# Altium PCB New_Energizer_SMD.PcbDoc (part 1 of 2)
Units mm, origin at the board's own origin, x right, y up, seen from the top; angles counter-clockwise.
Board outline 230.98 x 169 mm, 2 copper layers (Top Layer, Bottom Layer); 143 components, 111 nets, 443 pads, 129 vias.
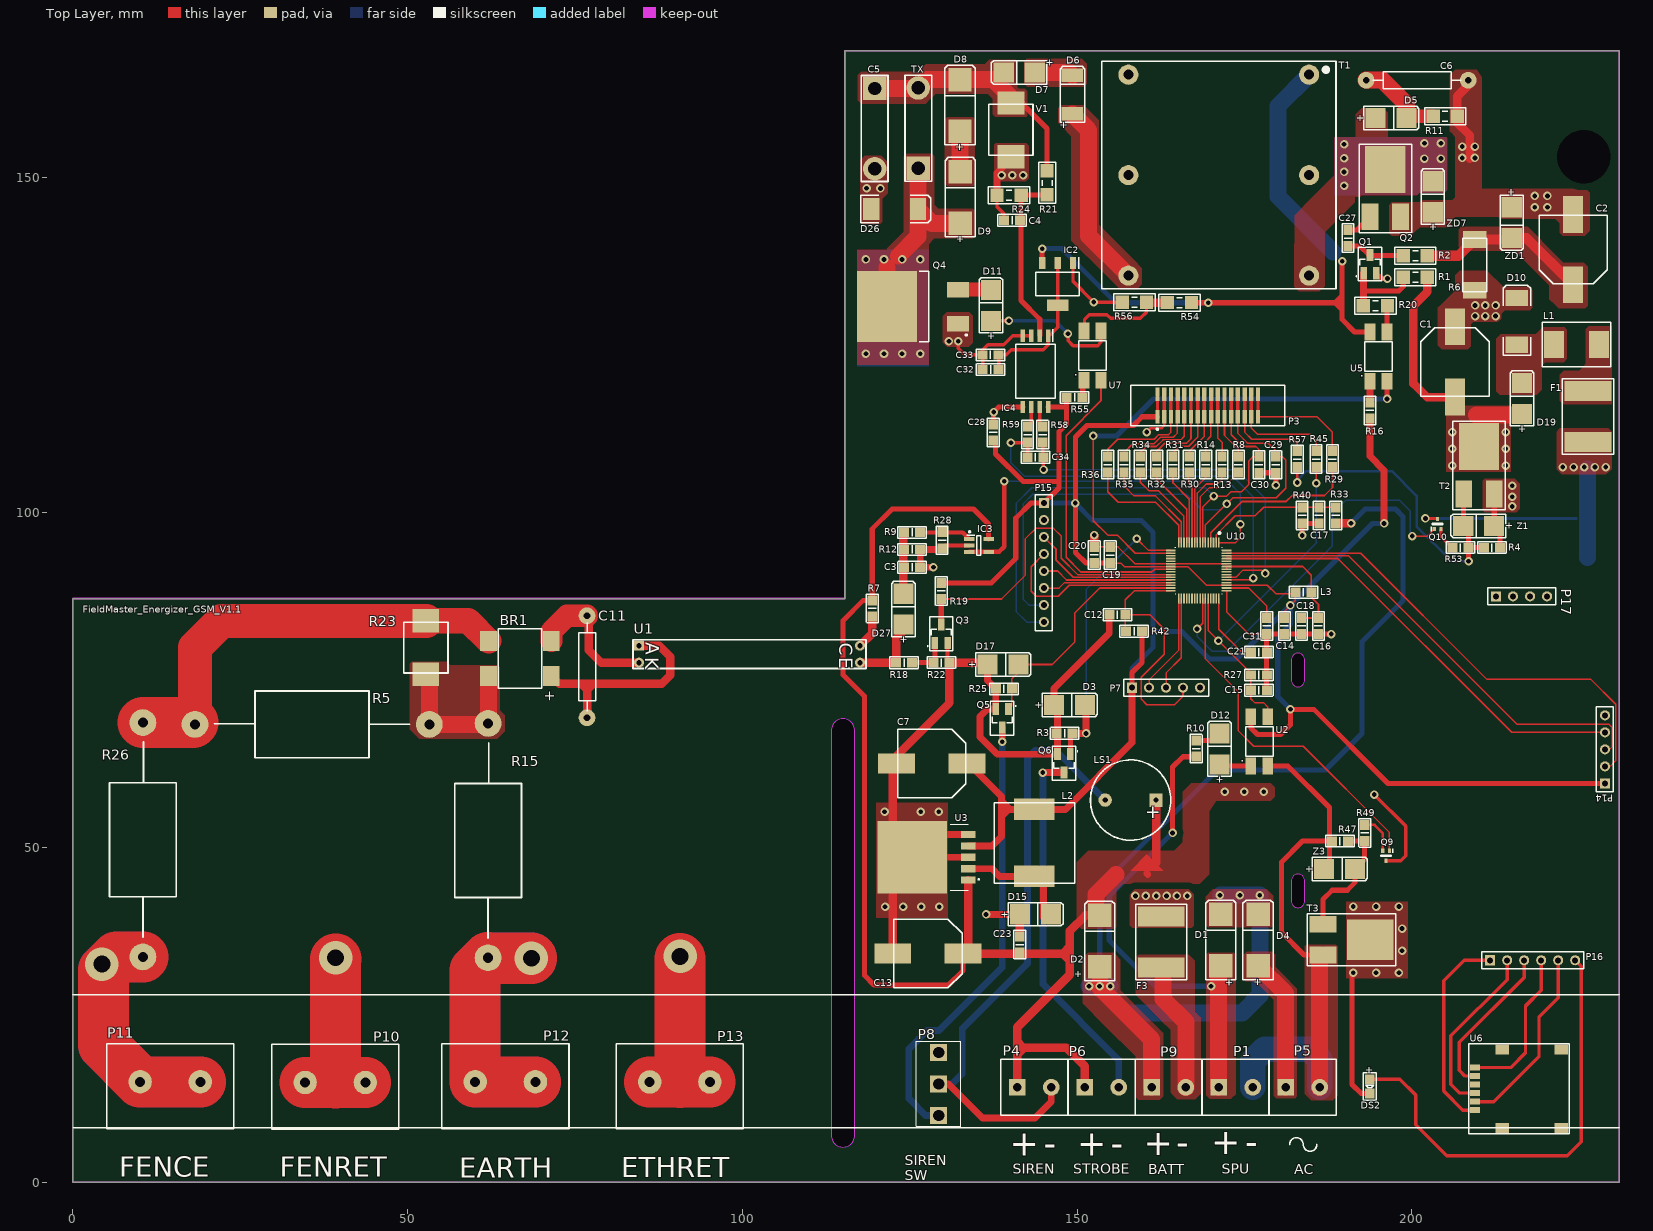
[diagram p0: Top Layer view]
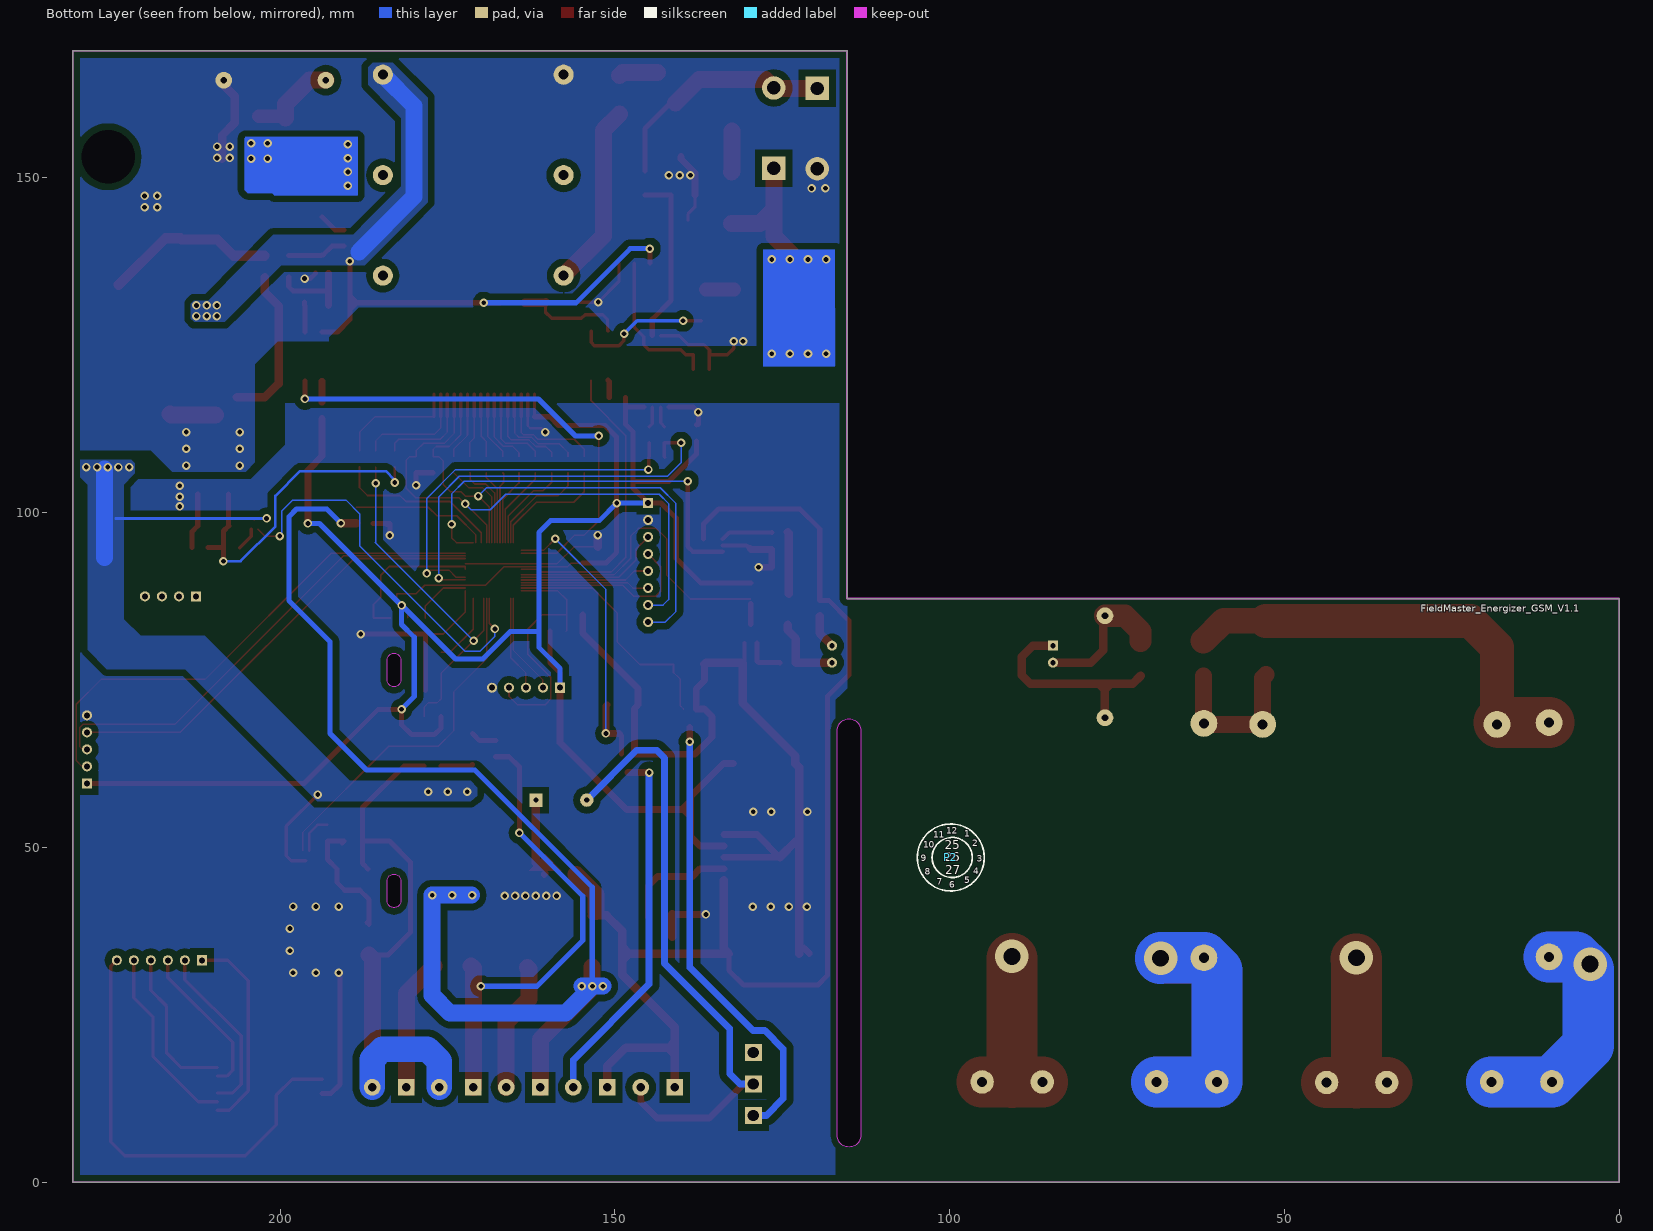
[diagram p1: Bottom Layer view, seen from below]

## Layer stack, top to bottom
Top Solder: solder mask 0.0102, Solder Resist, Dk 3.5
Top Layer: signal copper 0.0356
Dielectric 1: dielectric 0.32, FR-4, Dk 4.8
Bottom Layer: signal copper 0.0356
Bottom Solder: solder mask 0.0102, Solder Resist, Dk 3.5

## Board outline
0,0 0,87.175 115.325,87.175 115.325,169 230.975,169 230.975,0
cut-out: 113.275,7 ccw(c115.025,7) 116.775,7 116.775,67.45 ccw(c115.025,67.45) 113.275,67.45
cut-out: 181.975,42 ccw(c182.975,42) 183.975,42 183.975,45 ccw(c182.975,45) 181.975,45
cut-out: 181.975,75 ccw(c182.975,75) 183.975,75 183.975,78 ccw(c182.975,78) 181.975,78

## Design rules (kind name [scope] priority, off if disabled: settings)
Clearance Clearance_2 [InNamedPolygon('LOAD-_L02_P107')] p1: gap=1.016
Clearance Clearance_1 [InNamedPolygon('Bottom Layer-No Net')] p2: gap=1.016
Clearance Clearance_U10 [All vs HasFootprint('LQFP-64')] p3: gap=0.152
Clearance [All] p4: gap=0.254 except(0.14: Arc-Track Track-Track)
PolygonConnect [All] p1: connectstyle=Direct reliefconductorwidth=0.254 reliefentries=4 polygonreliefangle="90 Angle" airgapwidth=0.254
RoutingVias [All] p1: holewidth=0.711 width=1.27 viastyle="Through Hole" minholewidth=0.711 minwidth=1.27 maxholewidth=0.711 maxwidth=1.27
SolderMaskExpansion [All] p1: expansion=0.102
Width [All] p1: maxlimit=7.62 minlimit=0.203 preferedwidth=0.762 minimp=50.000000 maximp=50.000000 favimp=50.000000
30 further rules are at their usual default settings.

## Classes and differential pairs
component class Controller: 40 C7 C12 C13 C14 C16 C18 C19 C20 C23 C29 C30 D15 L2 L3 P7 P14 P15 R42 U3
component class Voltage_Booster: C1 C2 C4 C5 C6 C27 C28 C32 C33 C34 D5 D6 D7 D8 D9 D10 D11 D19 D26 IC2 IC4 Q1 Q2 Q4 R1 R2 R6 R11 R16 R20 R21 R24 R54 R55 R56 R58 R59 T1 TX U5 U7 V1 ZD1 ZD7
component class Controller_SolarCharge: BR1 C3 C11 C15 C17 D1 D2 D3 D4 D12 D17 D27 F1 F3 IC3 L1 LS1 P1 P2 P3 P4 P5 P6 P8 P9 P10 P11 P12 P13 Q3 Q5 Q6 Q9 Q10 R3 R4 R5 R7 R8 R9 R10 R12 R13 R14 R15 R18 R19 R22 R23 R25 R26 R27 R28 R29 R30 R31 R32 R33 R34 R35 R36 R40 R45 R47 R49 R53 R57 T2 T3 U1 U2 Z1 Z3
component class Controller_Part: C21 C31 U10
component class GSM_Module: DS2 P16 P17 U6

## Components (designator, comment, footprint, x,y, rotation, side; value= is the part's Value field where it differs from the comment)
BR1 "DB107S" "DB-S_BRIDGE RECTIFIER" 66.777,78.232 r270 top
C1 "Cap Pol1" CAP_470UF_10X10.2MM 206.425,122.5 r180 top
C2 "Cap Pol1" CAP_470UF_10X10.2MM 224.075,139.275 r0 top
C3 "Cap" 0805 125.35,91.85 r0 top
C4 "Cap" 0805 140.275,143.675 r0 top
C5 "Cap2" ENERGIZER_CONNECTOR 119.761,157.347 r270 top locked
C6 "Cap" "RES AXIAL-0.6" 200.775,164.575 r180 top
C7 "Cap2" CAP_470UF_10X10.2MM 128.275,62.525 r90 top
C11 "Cap" "RES AXIAL-0.6" 76.8,76.975 r270 top
C12 "Cap" 0805 156,84.75 r0 top
C13 "Cap2" CAP_470UF_10X10.2MM 127.7,34.15 r90 top
C14 "Cap2" 0805 180.95,83.1 r270 top
C15 "Cap" 0805 177.125,73.475 r180 top
C16 "Cap" 0805 186.025,83.075 r90 top
C17 "Cap" 0805 186.106,99.6 r270 top
C18 "Cap" 0805 183.5,83.075 r90 top
C19 "Cap" 0805 154.95,93.65 r270 top
C20 "Cap" 0805 152.55,93.675 r270 top
C21 "Cap" 0805 177.125,79.175 r180 top
C23 "Cap" 0805 141.425,35.475 r90 top
C27 "Cap" 0805 190.45,141 r90 top
C28 "Cap" 0805 137.475,111.975 r270 top
C29 "Cap" 0805 179.65,107.15 r270 top
C30 "Cap" 0805 177.15,107.15 r270 top
C31 "Cap" 0805 178.3,83.075 r90 top
C32 "Cap" 0805 137.075,121.375 r0 top
C33 "Cap" 0805 137.05,123.55 r0 top
C34 "Cap" 0805 143.75,108.275 r0 top
D1 "SS54" SMC#1 171.45,36.15 r90 top
D2 "SS54" SMC#1 153.375,36 r90 top
D3 "ZM4733A" SMA 148.85,71.3 r0 top
D4 "SS54" SMC#1 177.025,36.15 r90 top
D5 "M7 - (1N4007)" SMA 196.875,158.925 r0 top
D6 "RGL41M" DO-213AB 149.275,162.425 r90 top
D7 "M7 - (1N4007)" SMA 141.35,165.75 r180 top
D8 "S10MC" SMC#1 132.5,160.825 r90 top
D9 "S10MC" SMC#1 132.55,147.05 r90 top
D10 "SS54" SMC#2 215.65,128.55 r90 top
D11 "M7 - (1N4007)" SMA 137.1,130.95 r90 top
D12 "ZM4728A" SMA 171.25,64.7 r90 top
D15 "SS34" SMA 143.75,40.025 r0 top
D17 "ZM4733A" SMA 138.925,77.325 r0 top
D19 "SMBJ14CA" SMA 216.425,117.025 r90 top
D26 "S10MC" SMC#2 122.725,145.35 r0 top
D27 "SS14" SMA 124.05,85.575 r90 top
DS2 "NETLIGHT" 0805_LED 193.715,14.325 r270 top
F1 "LF-500/16 16V 5A" LF500-16 226.275,114.375 r90 top
F3 "LF-500/16 16V 5A" LF500-16 162.55,35.875 r90 top
IC2 "LM1117IMPX3.3_NOPB" SOT230P700X180-4N 147.075,134.125 r270 top
IC3 "LM321MF_NOPB" SOT95P280X145-5N 135.325,95.1 r0 top
IC4 "AMC1311BDWVR" SOIC127P1150X280-8N 143.775,121.1 r270 top
L1 "Inductor" INDUCTOR_SMD_3.3UH 224.55,125.125 r180 top
L2 "Inductor" Inductor_SMD_33uh 143.6,50.675 r90 top
L3 "Ferrite Bead_500mA" 0805 183.775,88.125 r0 top
LS1 "Buzzer" BUZZER 157.975,57.075 r180 top
P1 "SPU" "SCREW_TERMINAL 2PIN 5.08MM" 173.675,14.172 r0 top
P2 "Manufacturing Date" MFT_DATE 99.825,48.5 r180 bottom
P3 "Header 16" FPC_CON_16PIN 169.5,115.995 r0 top
P4 "SIREN" "SCREW_TERMINAL 2PIN 5.08MM" 143.6,14.172 r0 top
P5 "AC" "SCREW_TERMINAL 2PIN 5.08MM" 183.675,14.172 r0 top
P6 "STROBE" "SCREW_TERMINAL 2PIN 5.08MM" 153.663,14.172 r0 top
P7 "PROG" HDR1X5 158.195,73.85 r0 top
P8 "SIREN_SW" SWITCH_SLIDE 129.3,9.975 r0 top
P9 "BATT" "SCREW_TERMINAL 2PIN 5.08MM" 163.675,14.172 r0 top
P10 "PULSE_RET" "SCREW_TERMINAL ENERGIZER" 29.7,7.9 r0 top
P11 "GND2" "SCREW_TERMINAL ENERGIZER" 5.055,7.997 r0 top
P12 "PULSE" "SCREW_TERMINAL ENERGIZER" 55.093,7.997 r0 top
P13 "EARTH_RET" "SCREW_TERMINAL ENERGIZER" 81.15,7.975 r0 top
P14 "SIM_WIFI" HDR1X5 228.815,59.566 r90 top
P15 "LCD_CON" HDR1X8 145.025,101.435 r270 top
P16 "SIM_CARD" HDR1X6 211.67,33.15 r0 top
P17 "HOLDER" HDR1X4 212.559,87.506 r0 top
Q1 "BC847" SOT-23 193.725,137.125 r90 top
Q2 "IPD70R600P7S" "TO252 (DPAK)" 196.014,147.95 r0 top
Q3 "BC847" SOT-23 129.7,81.9 r90 top
Q4 "TN1625" D2PAK 123.632,139.792 r90 top
Q5 "SI2304" SOT-23 138.8,69.3 r270 top
Q6 "SI2304" SOT-23 148.025,62.55 r270 top
Q9 "DTC043ZEBTL" SOTFL50P160X85-3N 196.125,48.75 r270 top
Q10 "DTC043ZEBTL" SOTFL50P160X85-3N 203.825,98.3 r90 top
R1 "Res1" 1206 200.5,135.15 r0 top
R2 "Res1" 1206 200.5,138.375 r0 top
R3 "Res1" 0805 148.125,67.05 r0 top
R4 "Res1" 0805 211.925,94.775 r180 top
R5 "Res1" "POWER_RES 5W_35mm" 35.75,68.375 r180 top
R6 "Res1" 2512 209.375,137 r90 top
R7 "Res1" 0805 119.4,85.7 r90 top
R8 "Res1" 0805 174.073,107.175 r90 top
R9 "Res1" 0805 125.35,97.05 r180 top
R10 "Res1" 0805 167.775,64.75 r270 top
R11 "Res1" 1206 204.95,159.225 r180 top
R12 "Res1" 0805 125.35,94.5 r180 top
R13 "Res1" 0805 171.633,107.175 r90 top
R14 "Res1" 0805 169.192,107.175 r90 top
R15 "Power Resistor" "POWER_RES 5W_35mm" 62.025,51.025 r90 top
R16 "Res1" 0805 193.725,115.275 r270 top
R18 "Res1" 0805 124.15,77.575 r180 top
R19 "Res1" 0805 129.7,88.3 r90 top
R20 "Res1" 1206 194.55,130.925 r0 top
R21 "Res1" 1206 145.5,149.25 r270 top
R22 "Res1" 0805 129.725,77.6 r180 top
R23 "DV300K4032R2" 3225K471 52.725,79.85 r270 top
R24 "Res1" 1206 139.825,147.425 r180 top
R25 "Res1" 0805 139.05,73.675 r0 top
R26 "Power Resistor" "POWER_RES 5W_35mm" 10.475,51.15 r90 top
R27 "Res1" 0805 177.125,75.75 r180 top
R28 "Res1" 0805 129.825,95.875 r90 top
R29 "Res1" 0805 188.125,108 r90 top
R30 "Res1" 0805 166.752,107.175 r90 top
R31 "Res1" 0805 164.312,107.175 r90 top
R32 "Res1" 0805 161.871,107.175 r90 top
R33 "Res1" 0805 188.625,99.6 r270 top
R34 "Res1" 0805 159.431,107.175 r90 top
R35 "Res1" 0805 156.99,107.175 r90 top
R36 "Res1" 0805 154.55,107.175 r90 top
R40 "Res1" 0805 183.588,99.6 r90 top
R42 "Res1" 0805 158.5,82.3 r180 top
R45 "Res1" 0805 185.685,108 r90 top
R47 "Res1" 0805 189.225,50.95 r0 top
R49 "Res1" 0805 192.95,52.175 r90 top
R53 "Res1" 0805 207.225,94.775 r180 top
R54 "Res1" 1206 165.275,131.375 r0 top
R55 "Res1" 0805 149.625,117.2 r180 top
R56 "Res1" 1206 158.55,131.4 r0 top
R57 "Res1" 0805 182.875,107.975 r270 top
R58 "Res1" 0805 144.85,111.65 r270 top
R59 "Res1" 0805 142.6,111.65 r270 top
T1 "Trans" TRANSFORMER_ENERGIZER 171.15,150.4 r180 top
T2 "FQD20N06 MOSFET-N" "TO252 (DPAK)" 210,106.575 r0 top
T3 "FQD20N06 MOSFET-N" "TO252 (DPAK)" 190.5,36.225 r270 top
TX "High KV Transfomer Connection" ENERGIZER_CONNECTOR 126.257,157.424 r90 top locked
U1 "Optoisolator1" "IR ISOLATED" 101.067,78.867 r270 top
U2 "EL357" SOP4 177.2,65.85 r90 top
U3 "LM2596T-3.3V" LM2596S50TR 129.537,48.525 r0 top
U5 "EL357" SOP4 195,123.3 r90 top
U6 "NanoSIM_Holder" Nano_SIMCard_Holder 209.4,10.78 r90 top locked
U7 "EL357" SOP4 152.275,123.45 r90 top
U10 "M031SE3AE" LQFP-64 168.15,91.35 r270 top
V1 "MOV S20K680" 3225K471 140.1,157.175 r90 top
Z1 "ZM4744A" SMA 209.96,98.025 r180 top
Z3 "ZM4744A" SMA 189.2,46.8 r0 top
ZD1 "ZM4739A" SMA 214.9,143.3 r270 top
ZD7 "1SMA120Z" SMA 203.1,147.175 r90 top

## Footprints (in the part's own frame and the unit in brackets; to place one, negate y for a bottom-side part, rotate by r counter-clockwise, add the part's x,y. Pads: shape width x height; smd on the part's side, far side on the other; paste and mask are expansions set on the pad)
0805 [mm]
  rect 1.5x1.4 smd: 1(-1.2,0) 2(1.2,0)
  silkscreen extent -2.13,-0.87 2.13,0.87, body extent -1.07,-0.7 1.07,0.7, height 0.7
0805_LED [mm]
  rect 1.5x1.4 smd: 1(-1.05,0) 2(1.05,0)
  silkscreen extent -2.05,-0.97 2.05,0.98, body extent -1.07,-0.7 1.07,0.7, height 0.7
1206 [mm]
  rect 2x2 smd: 1(-1.8,0) 2(1.8,0)
  silkscreen extent -3.07,-1.28 3.08,1.27, body extent -1.7,-0.9 1.7,0.9, height 1.3
2512 [mm]
  rect 2.5x3.5 smd: 1(-3.8,0) 2(3.8,0)
  silkscreen extent -4,-1.8 4,1.8, body extent -3.15,-1.55 3.15,1.55, height 0.6
3225K471 [mm] "3225k471 SMD Mov"
  rect 3.5x4 smd: 1(-4,0) 2(4,0)
  silkscreen extent -3.8,-3.3 3.8,3.3
BUZZER [mm] "5V BUZZER"
  rect 2x2 hole 0.8: 1(-3.8,0)
  round 2 hole 0.8: 2(3.8,0)
  silkscreen extent -6,-6 6,6
CAP_470UF_10X10.2MM [mm]
  rect 3x5.5 smd: 1(0,-5.25) 2(0,5.25)
  silkscreen extent -5.1,-5.1 5.1,5.1
D2PAK [mm]
  rect 2.3x3.3 smd: 1(-11.557,-8.568) 3(-6.477,-8.568)
  rect 10.65x8.9 smd: 2(-9.017,2.032)
  silkscreen extent -14.27,-9.93 -3.77,-2.82, body extent -14.29,-4.22 -3.74,4.78, height 4.69
"DB-S_BRIDGE RECTIFIER" [mm]
  rect 3x2.5 smd: 1(2.6,4.69) 2(-2.6,4.69) 3(-2.6,-4.69) 4(2.6,-4.69)
  silkscreen extent -4.44,-3.25 4.44,3.25
DO-213AB [mm]
  rect 2x3.2 smd: 1(-2.875,0) 2(2.875,0)
  silkscreen extent -4.12,-1.85 4.22,1.83
ENERGIZER_CONNECTOR [mm] "ENERGIZER CONNECTOR FOR CAP AND TRANS"
  rect 3.5x3.5 hole 2: 1(-6,0)
  round 3.5 hole 2: 2(6,0)
  silkscreen extent -7.95,-2.03 7.89,1.97
FPC_CON_16PIN [mm] "FPC_CON_16PIN"
  rect 0.65x2 smd: 1(-7.5,-1.68) 1(-7.5,1.68) 2(-6.5,-1.68) 2(-6.5,1.68) 3(-5.5,-1.68) 3(-5.5,1.68) 4(-4.5,-1.68) 4(-4.5,1.68) 5(-3.5,-1.68) 5(-3.5,1.68) 6(-2.5,-1.68) 6(-2.5,1.68) 7(-1.5,-1.68) 7(-1.5,1.68) 8(-0.5,-1.68) 8(-0.5,1.68) 9(0.5,-1.68) 9(0.5,1.68) 10(1.5,-1.68) 10(1.5,1.68) 11(2.5,-1.68) 11(2.5,1.68) 12(3.5,-1.68) 12(3.5,1.68) 13(4.5,-1.68) 13(4.5,1.68) 14(5.5,-1.68) 14(5.5,1.68) 15(6.5,-1.68) 15(6.5,1.68) 16(7.5,-1.68) 16(7.5,1.68)
  silkscreen extent -11.5,-3.67 11.5,3.02
HDR1X4 [mm] "Connector; Header; 4 Position"
  rect 1.5x1.5 hole 0.9: 1(0,0)
  round 1.5 hole 0.9: 2(2.54,0) 3(5.08,0) 4(7.62,0)
  silkscreen extent -1.27,-1.27 8.89,1.27
HDR1X5 [mm] "Connector; Header; 5 Position"
  rect 1.5x1.5 hole 0.9: 1(0,0)
  round 1.5 hole 0.9: 2(2.54,0) 3(5.08,0) 4(7.62,0) 5(10.16,0)
  silkscreen extent -1.27,-1.27 11.43,1.27
HDR1X6 [mm] "Connector; Header; 6 Position"
  rect 1.5x1.5 hole 0.9: 1(0,0)
  round 1.5 hole 0.9: 2(2.54,0) 3(5.08,0) 4(7.62,0) 5(10.16,0) 6(12.7,0)
  silkscreen extent -1.27,-1.27 13.97,1.27
HDR1X8 [mm] "Connector; Header; 8 Position"
  rect 1.5x1.5 hole 0.9: 1(0,0)
  round 1.5 hole 0.9: 2(2.54,0) 3(5.08,0) 4(7.62,0) 5(10.16,0) 6(12.7,0) 7(15.24,0) 8(17.78,0)
  silkscreen extent -1.27,-1.27 19.05,1.27
INDUCTOR_SMD_3.3UH [mm]
  rect 3x4 smd: 1(-3.35,0) 2(3.35,0)
  silkscreen extent -5.1,-3.33 5.13,3.33
Inductor_SMD_33uh [mm]
  rect 3.2x6 smd: 1(-5,0) 2(5,0)
  silkscreen extent -6,-6 6,6
"IR ISOLATED" [mm] "IR ISOLATED FOR ENERGIZER FEEDBACK"
  rect 1.5x1.5 hole 0.8: 1(-1.27,-16.5)
  round 1.5 hole 0.8: 2(1.27,-16.5) 3(1.27,16.5) 4(-1.27,16.5)
  silkscreen extent -2.16,-17.4 2.16,17.4
LF500-16 [mm]
  rect 3x7 smd: 1(-3.8,0) 2(3.8,0)
  silkscreen extent -5.65,-3.83 5.65,3.83
LM2596S50TR [mm]
  rect 2.16x1.07 smd: 1(4.162,-3.4) 2(4.162,-1.7) 3(4.162,0) 4(4.162,1.7) 5(4.162,3.4)
  rect 10.41x10.8 smd: 3(-4.162,0)
  silkscreen extent 1.5,-4.95 5.8,4.96
LQFP-64 [mm]
  rrect25% 1.47x0.24 smd: 1(-4.17,3) 2(-4.17,2.6) 3(-4.17,2.2) 4(-4.17,1.8) 5(-4.17,1.4) 6(-4.17,1) 7(-4.17,0.6) 8(-4.17,0.2) 9(-4.17,-0.2) 10(-4.17,-0.6) 11(-4.17,-1) 12(-4.17,-1.4) 13(-4.17,-1.8) 14(-4.17,-2.2) 15(-4.17,-2.6) 16(-4.17,-3) 33(4.17,-3) 34(4.17,-2.6) 35(4.17,-2.2) 36(4.17,-1.8) 37(4.17,-1.4) 38(4.17,-1) 39(4.17,-0.6) 40(4.17,-0.2) 41(4.17,0.2) 42(4.17,0.6) 43(4.17,1) 44(4.17,1.4) 45(4.17,1.8) 46(4.17,2.2) 47(4.17,2.6) 48(4.17,3)
  rrect25% 0.24x1.47 smd: 17(-3,-4.17) 18(-2.6,-4.17) 19(-2.2,-4.17) 20(-1.8,-4.17) 21(-1.4,-4.17) 22(-1,-4.17) 23(-0.6,-4.17) 24(-0.2,-4.17) 25(0.2,-4.17) 26(0.6,-4.17) 27(1,-4.17) 28(1.4,-4.17) 29(1.8,-4.17) 30(2.2,-4.17) 31(2.6,-4.17) 32(3,-4.17) 49(3,4.17) 50(2.6,4.17) 51(2.2,4.17) 52(1.8,4.17) 53(1.4,4.17) 54(1,4.17) 55(0.6,4.17) 56(0.2,4.17) 57(-0.2,4.17) 58(-0.6,4.17) 59(-1,4.17) 60(-1.4,4.17) 61(-1.8,4.17) 62(-2.2,4.17) 63(-2.6,4.17) 64(-3,4.17)
  silkscreen extent -5.7,-3.5 3.5,3.5
MFT_DATE [mm] "Manufacturing Date"
  silkscreen extent -5,-5 5,5
Nano_SIMCard_Holder [mm] "Nano SIM Card Holder_Sunrom 5519"
  rect 1.5x2 smd: 0(-2.68,-4.1) 0(-2.68,-12.9) 0(9.02,-4.1) 0(9.02,-12.9)
  rect 0.9x1.5 smd: 1(0,0) 2(2.54,0) 3(5.08,0) 5(1.27,0) 6(3.81,0) 7(6.35,0)
  silkscreen extent -3.57,-14.05 9.92,0.9
"POWER_RES 5W_35mm" [mm] "POWER RESISTOR 5W 35mm pitch"
  round 4 hole 1.5: 1(-17.5,0) 2(17.5,0)
  silkscreen extent -14.55,-5 14.62,5
"RES AXIAL-0.6" [mm] "Axial Device, Thru-Hole; 2 Leads; 0.6 in Pin Spacing"
  round 2.5 hole 1: 1(-7.62,0) 2(7.62,0)
  silkscreen extent -6.6,-1.27 6.6,1.27
"SCREW_TERMINAL 2PIN 5.08MM" [mm] "SCREW_TERMINAL 2PIN 5.08MM"
  rect 2.5x2.5 hole 1.3: 1(-2.54,0)
  round 2.5 hole 1.3: 2(2.54,0)
  silkscreen extent -5.02,-4.15 5.02,4.2
"SCREW_TERMINAL ENERGIZER" [mm] "SCREW_TERMINAL 2PIN 5.08MM"
  round 3.5 hole 1.5: 1(5,7) 2(14,7)
  silkscreen extent 0,0 19,12.7
SMA [mm]
  rect 3x3 smd: 1(-2.31,0) 2(2.31,0)
  silkscreen extent -4.08,-1.75 4.15,1.75
SMC#1 [mm]
  rect 3.5x3.5 smd: 1(-3.85,0) 2(3.85,0)
  silkscreen extent -5.87,-2.25 6,2.28
SMC#2 [mm] "DO-214-AB/SMC; 2 C-Bend Leads; Body 7.9 x 5.9 mm, inc. leads (LxW)"
  rect 2.4x3.3 smd: 1(-3.475,0) 2(3.475,0)
  silkscreen extent -5.07,-2.05 5.43,2.05
SOIC127P1150X280-8N [mm]
  rect 1.85x0.65 smd: 1(-5.325,1.905) 2(-5.325,0.635) 3(-5.325,-0.635) 4(-5.325,-1.905) 5(5.325,-1.905) 6(5.325,-0.635) 7(5.325,0.635) 8(5.325,1.905)
  silkscreen extent -6.25,-2.93 4.05,2.93, body extent -5.75,-2.93 5.75,2.93, height 2.8
SOP4 [mm]
  rect 2.5x1.6 smd: 1(-3.675,1.27) 2(-3.675,-1.27) 3(3.675,-1.27) 4(3.675,1.27)
  silkscreen extent -2.2,-2.05 2.2,2.05
SOT95P280X145-5N [mm]
  rect 1.6x0.6 smd: 1(-1.45,0.95) 2(-1.45,0) 3(-1.45,-0.95) 4(1.45,-0.95) 5(1.45,0.95)
  silkscreen extent -1.85,-1.45 0.3,2.16, body extent -1.4,-1.45 1.4,1.45, height 1.2
SOT230P700X180-4N [mm]
  rect 1.75x0.95 smd: 1(-3.15,2.3) 2(-3.15,0) 3(-3.15,-2.3)
  rect 1.75x3.2 smd: 4(3.15,0)
  silkscreen extent -4.03,-3.25 1.75,3.25, body extent -3.5,-3.25 3.5,3.25, height 1.8
SOT-23 [mm] "SOT23, 3-Leads, Body 2.9x1.3mm, Pitch 0.95mm, Lead Span 2.5mm, IPC Medium Density"
  rect 1.8x1 smd: 1(-1.375,0.95) 2(-1.375,-0.95) 3(1.375,0)
  silkscreen extent -2.52,-1.75 2.52,2.1, body extent -0.7,-1.5 0.7,1.5, height 1.1
SOTFL50P160X85-3N [mm]
  rect 0.64x0.47 smd: 1(-0.75,0.5) 2(-0.75,-0.5) 3(0.75,0)
  silkscreen extent -1.07,-0.8 0.08,0.98, body extent -0.8,-0.8 0.8,0.8, height 0.85
SWITCH_SLIDE [mm] "SWITCH_SLIDE 1P2T"
  rect 2.5x2.5 hole 1.7: 1(0,0) 2(0,4.7) 3(0,9.4)
  silkscreen extent -3.3,-1.65 3.3,11.05
"TO252 (DPAK)" [mm]
  rect 2.5x4 smd: 1(-2.286,-3.775) 3(2.286,-3.775)
  rect 6x7 smd: 2(0,3.275)
  silkscreen extent -3.88,-6.15 3.93,7.1
TRANSFORMER_ENERGIZER [mm] "TRANSFORMER ENERGIZER VOLTAGE BOOSTER"
  round 3 hole 1.5: 1(-13.5,-15) 2(-13.5,0) 3(-13.5,15) 4(13.5,15) 5(13.5,0) 6(13.5,-15)
  silkscreen extent -17.5,-17 17.5,16.95

## Part data
BR1: library part Bridge2, "Diode Bridge"
C1 C2: "Polarized Capacitor (Radial)"
C3 C4 C5 C6 C7 C11 C12 C13 C14 C15 C16 C17 C18 C19 C20 C21 C23 C27 C28 C29 C30 C31 C32 C33 C34: "Capacitor"
D1 D2 D4 D10 D27: library part "Diode BAT17", "Silicon RF Schottky Diode for Mixer Applications in the VHF/UHF Range"
D3 D17: library part "D Zener", "TVS Diode"
D5 D6 D7: library part "Diode 1N5408", "3 Amp Medium Power Silicon Rectifier Diode"
D8 D9: library part Diode, "Default Diode"
D11: library part "Diode 1N4007", "1 Amp General Purpose Rectifier"
D12 D19 Z1 Z3 ZD1 ZD7: library part "D Zener", "Zener Diode"
D15: library part "Diode 10TQ035", "Schottky Rectifier"
D26: library part "Diode 1N4007", "Diode P600M"
DS2: library part LED0, "LED 5mm Diameter"
F1 F3: library part "Fuse 2", "Fuse"
IC2 IC3 IC4: "Integrated Circuit"
L3: library part Inductor, "Inductor"
LS1: "Magnetic Transducer Buzzer"
P1 P4 P5 P6 P9: library part "Header 2", "SCREW_TERMINAL 2PIN 5.08MM"
P2: library part Plug, "Plug"
P3: "Header, 16-Pin"
P7 P14: library part "Header 5", "Header, 5-Pin"
P8: library part "Header 3", "Header, 3-Pin"
P10 P12: library part "Header 2", "SCREW_TERMINAL 2PIN 9.25MM"
P11 P13 TX: library part "Header 2", "Header, 2-Pin"
P15: library part "Header 8", "Header, 8-Pin"
P16: library part "Header 6", "Header, 6-Pin"
P17: library part "Header 4", "Header, 4-Pin"
Q1 Q3: library part 2N3904, "NPN General Purpose Amplifier"
Q2 T2 T3: library part MOSFET-N, "N-Channel MOSFET"
Q4: library part SCR, "Silicon Controlled Rectifier"
Q5 Q6: library part MOSFET-N, "SI2304 A4SHB MOSFET-N"
Q9 Q10: "Transistor BJT NPN"
R1 R2 R3 R4 R5 R6 R7 R8 R9 R10 R11 R12 R13 R14 R16 R18 R19 R20 R21 R22 R24 R25 R27 R28 R29 R30 R31 R32 R33 R34 R35 R36 R40 R42 R45 R47 R49 R53 R54 R55 R56 R57 R58 R59: "Resistor"
R15 R26: library part Res2, "Resistor"
R23 V1: library part "Res Varistor", "Varistor (Voltage-Sensitive Resistor)"
T1: "Transformer For Voltage Booster"
U1: "Optocoupler for Return"
U2 U5 U7: library part Optoisolator1, "4-Pin Phototransistor Optocoupler"
U3: library part LM2596T-ADJ

## Free pads (board coordinates)
  round 0 hole 8 unplated: 2(225.675,153.138)

## Via types
v1: diameter 1.27, hole 0.711, Top Layer to Bottom Layer, 125 vias
v2: diameter 5, hole 2.5, Top Layer to Bottom Layer, 4 vias

## Nets (pads, with @x,y where several pads share a name; then routed paths per layer and width w, separated by ;. In a path a pad name is that pad's centre, name@x,y a point inside that pad or via, vN(x,y) a via of type N, cw(c..) or ccw(c..) an arc to the next point about the centre after c; other vN are vias at no path point)
3V3: C7.1 C14.1 C19.2 C20.2 C28.2 IC4.8 L2.2 L3.1 P3.1 P7.1 P14.1 P15.1 R16.2 R19.2 R42.1 R55.2 U2.4 U3.4 U10.23 U10.51 | length 374.9
  Top Layer w0.229: C19.2@154.8,92.475 156.5,92.475 157.025,91.95 U10.23@163.98,91.95 166.5,91.95 169.3,89.15 U10.51@172.32,89.15 178.4,89.15 179.675,87.875 182.575,87.875 182.575,86.875 180.95,85.25 C14.1@180.95,84.3
  Top Layer w0.508: P3.1@162,114.315 P3.1@162,117.675
  Top Layer w0.762: R19.2@129.7,89.5 137.175,89.5 140.825,93.15 140.825,99.175 143.085,101.435 P15.1@145.025,101.435 147.275,103.685 147.275,104.675 ; C28.2@137.8,110.675 137.8,108.775 141.9,104.675 147.275,104.675 ; IC4.8@145.68,115.775 148.325,115.775 148.425,115.675 ; R55.2@148.425,117.2 148.425,115.675 ; C19.2@154.8,92.475 C20.2@152.55,92.475 151.3,92.475 149.75,94.025 149.75,111.3 151.45,113 158.4,113 159.715,114.315 P3.1@162,114.315 ; P7.1@158.195,73.85 158.195,76.12 159.7,77.625 R42.1@159.7,82.3 ; U2.4@175.93,69.525 175.93,67.845 176.925,66.85 180.375,66.85 181.85,68.325 v1(181.85,70.625) 185.345,70.625 196.404,59.566 P14.1@228.815,59.566 ; 147.275,104.675 147.275,112.075 148.425,113.225 148.425,115.675
  Top Layer w1.016: C7.1@132.275,62.525 C7.1@133.525,62.525 133.775,62.525 138.675,57.625 138.675,55.425 ; U3.4@133.699,50.225 137.25,50.225 138.675,51.65 138.675,55.425 ; P7.1@158.195,73.85 158.195,65.645 148.225,55.675 L2.2@143.6,55.675 138.925,55.675 138.675,55.425 ; R16.2@193.725,114.075 193.725,108.425 195.825,106.325 v1(195.825,98.39)
  Bottom Layer w0.762: P15.1@145.025,101.435 149.69,101.435 v1(149.7,101.425) 152.325,98.8 159.6,98.8 161.35,97.05 161.35,82.225 ; P7.1@158.195,73.85 158.195,76.745 161.35,79.9 161.35,82.225 ; v1(181.85,70.625) 179.95,72.525 179.95,81.4 181.85,83.3 v1(181.85,86.15) ; v1(195.825,98.39) 194.09,98.39 v1(181.85,86.15) ; 161.35,82.225 165.65,82.225 169.725,78.15 173.775,78.15 181.775,86.15 v1(181.85,86.15)
AUTO_LED: R29.1 U10.4 | length 25.5
  Top Layer w0.254: U10.4@169.95,95.52 169.95,96.975 174.65,101.675 181.225,101.675 182.1,102.55 186.925,102.55 188.125,103.75 R29.1@188.125,106.8
AUTO_SW: C29.1 P3.13 P15.7 U10.6 | length 86.3
  Top Layer w0.229: U10.6@169.15,95.52 169.15,98.2 172.25,101.3 v1(172.35,101.3) 173.275,102.225 179.725,102.225 181.15,103.65 181.15,107.85 180.65,108.35 C29.1@179.65,108.35 179.65,109.275 178.55,110.375 175.45,110.375 174,111.825 P3.13@174,114.315
  Top Layer w0.508: P3.13@174,114.315 P3.13@174,117.675
  Bottom Layer w0.229: P15.7@145.025,86.195 142.805,86.195 141.975,87.025 141.975,101.35 143.375,102.75 166.275,102.75 168.6,100.425 171.475,100.425 v1(172.35,101.3)
AVDD: C16.2 C18.2 L3.2 U10.57 U10.58 | length 22.9
  Top Layer w0.254: U10.57@172.32,91.55 U10.58@172.32,91.95 183.675,91.95 184.975,90.65 L3.2@184.975,88.125 184.975,87.375 186.025,86.325 C16.2@186.025,84.275 C18.2@183.5,84.275
BATT+: D1.2 D2.1 D4.2 P9.1 R33.2 | length 181.6
  Top Layer w1.27: R33.2@188.625,98.4 v1(190.9,98.4)
  Top Layer w2.54: D2.1@153.375,32.15 153.375,29.1 161.135,21.34 P9.1@161.135,14.172
  Bottom Layer w0.762: v1@153.375,29.25 153.375,29.275 153.375,44.05 170.9,61.575 187.075,61.575 192.525,67.025 192.525,80.725 198.65,86.85 198.65,99.4 197.525,100.525 193.025,100.525 v1(190.9,98.4)
  Bottom Layer w2.54: v1(151.775,29.275) v1(153.35,29.275) 153.375,29.275 v1(154.925,29.275) ; v1@153.375,29.25 157.375,25.25 174.6,25.25 177.275,27.925 v1(177.275,42.875) v1(174.3,42.875) v1@171.425,42.875
  other v1: 171.325,42.875
BATT-: C3.2 C7.2 C12.1 C13.2 C14.2 C15.1 C16.1 C17.2 C18.1 C19.1 C20.1 C21.1 C23.2 C28.1 C29.2 C30.2 C31.1 D3.1 D15.1 D17.1 DS2.2 F3.2 IC3.2 IC4.5 P3.2 P7.5 P14.5 P15.2 Q3.2 Q5.2 Q6.2 R3.1 R4.1 R12.1 R22.1 R25.1 R27.1 R28.1 R40.1 T2.3 T3.2 U3.3 U3.5 U10.22 U10.49 U10.59 Z1.1 | length 251.8
  Top Layer w0.229: C20.1@152.55,94.875 156.1,94.875 158.625,92.35 U10.22@163.98,92.35 U10.59@172.32,92.35 ; U10.49@172.32,88.35 172.32,85.18 175.625,81.875 C31.1@178.3,81.875
  Top Layer w0.381: v1(160.375,112.025) 160.925,112.575 162.6,112.575 163,112.975 P3.2@163,114.315
  Top Layer w0.508: P3.2@163,114.315 P3.2@163,117.675
  Top Layer w0.635: R28.1@129.825,94.625 130.3,95.1 IC3.2@133.875,95.1 ; Q3.2@130.65,80.525 130.65,77.875 R22.1@130.925,77.6
  Top Layer w0.762: C28.1@137.475,113.175 137.475,114.975 v1(137.525,115.025) 138.275,115.775 IC4.5@141.87,115.775 ; C28.1@137.8,113.075 C28.1@137.8,113.175 ; C30.2@177.15,105.95 C29.2@179.65,105.95 179.675,105.925 v1(179.675,104.1) ; C15.1@178.3,73.475 C31.1@178.3,81.875 C16.1@186.025,81.875 187.92,81.875 v1(187.932,81.863) ; v1(183.6,96.6) 183.588,96.612 R40.1@183.588,98.4 C17.2@186.106,98.4 C17.2@186.056,98.35 ; R40.1@184.081,98.225 R40.1@184.131,98.275 ; v1(191.225,31.275) 191.05,31.1 191.05,14.6 192.375,13.275 DS2.2@193.715,13.275 ; T2.3@212.286,102.8 212.286,98.041 Z1.1@212.27,98.025 213.125,97.17 R4.1@213.125,94.775
  Top Layer w1.016: C13.2@120.95,34.15 C13.2@121.775,34.975 ; v1(128.525,91.85) C3.2@126.55,91.85 R12.1@126.55,94.5 129.7,94.5 R28.1@129.825,94.625 ; U3.3@133.699,48.525 U3.3@125.375,48.525 128.775,51.925 U3.5@133.699,51.925 ; v1(136.4,40) 141.415,40 D15.1@141.44,40.025 ; D17.1@136.615,77.325 136.615,74.91 R25.1@137.85,73.675 ; R25.1@137.812,73.638 137.85,73.6 Q5.2@137.85,70.675 136.625,70.675 135.5,69.55 135.5,66.475 138.05,63.925 Q6.2@147.075,63.925 147.075,70.765 D3.1@146.54,71.3 146.54,73.74 154.8,82 C12.1@154.8,84.75
  Top Layer w1.27: C13.2@122.45,34.15 122.45,61.95 C7.2@123.025,62.525 123.025,63.675 130.925,71.575 R22.1@130.925,77.6 136.34,77.6 D17.1@136.615,77.325 ; U3.3@123.025,50.875 U3.3@125.375,48.525 ; C23.2@141.425,36.675 141.44,36.69 D15.1@141.44,40.025 ; C20.1@152.55,94.875 v1(152.55,96.65)
  other v1: 194.638,31.275 198.05,31.275 198.525,34.575 198.525,37.875 121.3,41.15 124,41.15 126.7,41.15 129.4,41.15 191.225,41.175 194.638,41.175 198.05,41.175 158.7,42.75 160.25,42.75 161.8,42.75 163.35,42.75 164.9,42.75 166.45,42.75 121.225,55.325 126.625,55.325 129.325,55.325 214.975,100.925 214.975,102.375 214.975,104
BATT_A+: C13.1 C23.1 D2.2 F1.1 IC3.5 LS1.1 P4.1 P6.1 Q9.3 Q10.3 R7.2 U3.1 | length 254.3
  Top Layer w0.381: v1@201.85,99.125 v1(202,99.125) 203.8,99.125 203.85,99.075 Q10.3@203.825,99.05
  Top Layer w0.508: v1(194.35,57.9) 199.05,53.2 199.05,48.75 198.3,48 Q9.3@196.125,48
  Top Layer w0.762: C13.1@132.95,34.15 132.95,31.6 130.8,29.45 119.675,29.45 118.225,30.9 118.225,72.575 115.05,75.75 115.05,83.9 118.05,86.9 R7.2@119.4,86.9 119.4,97.575 122.375,100.55 134.525,100.55 136.775,98.3 IC3.5@136.775,96.05
  Top Layer w1.016: 160.4,46.1 160.55,45.95
  Top Layer w1.27: U3.1@133.699,45.125 133.699,34.899 C13.1@132.95,34.15 148.9,34.15 ; P4.1@141.06,14.172 141.06,20.1 ; P6.1@151.123,14.172 151.123,17.352 148.375,20.1 141.06,20.1 ; D2.2@152.8,40.425 D2.2@153.375,39.85 ; D2.2@153.412,39.812 D2.2@153.375,39.85 ; 161.775,47.725 LS1.1@161.775,57.075 ; 141.06,20.1 141.06,23.135 148.9,30.975 148.9,34.15 ; 148.9,34.15 148.9,37.525 151.225,39.85 D2.2@153.375,39.85
  Top Layer w2.54: D2.2@152.8,40.425 152.8,42.95 155.8,45.95
  Bottom Layer w0.381: v1@201.85,99.125 v1(202,99.125) 224.525,99.125
  Bottom Layer w2.54: 226.225,93.275 v1@226.225,106.5
  other v1: 172.05,58.325 174.963,58.325 177.875,58.325 222.525,106.8 224.125,106.8 225.725,106.8 227.325,106.8 228.925,106.8
BATT_B: R32.1 U10.13 | length 12.3
  Top Layer w0.254: R32.1@161.871,105.975 161.871,104.979 166.35,100.5 U10.13@166.35,95.52
BATT_G: R31.1 U10.12 | length 11.5
  Top Layer w0.254: R31.1@164.312,105.975 164.312,104.438 166.75,102 U10.12@166.75,95.52
BATT_R: R30.1 U10.11 | length 10.8
  Top Layer w0.254: R30.1@166.752,105.975 166.575,105.798 166.575,104.525 167.15,103.95 U10.11@167.15,95.52
BATT_VOLT: C17.1 R33.1 R40.2 U10.2 | length 20.7
  Top Layer w0.229: U10.2@170.75,95.52 170.75,96.675 173.6,99.525 176.575,99.525 177.85,100.8 R40.2@183.588,100.8 C17.1@186.106,100.8 R33.1@188.625,100.8
BOOST_OUT_VOLT: C4.2 IC4.2 R21.2 R24.1 | length 26
  Top Layer w0.762: IC4.2@144.41,126.425 144.41,128.89 141.625,131.675 R24.1@141.625,147.425 145.475,147.425 R21.2@145.5,147.45
BOOST_OUT_VOLT_N: C34.1 R59.2 U10.53 | length 62.2
  Top Layer w0.229: U10.53@172.32,89.95 176.025,89.95 v1(176.3,90.225)
  Top Layer w0.508: v1(140.1,110.45) R59.2@142.6,110.45 142.6,108.325 C34.1@142.55,108.275
  Bottom Layer w0.229: v1(140.1,110.45) 140.1,107.45 142.128,105.422 145.391,105.422 145.394,105.425 173.225,105.425 176.3,102.35 v1(176.3,90.225)
BOOST_OUT_VOLT_P: C34.2 R58.2 U10.54 | length 56.6
  Top Layer w0.229: U10.54@172.32,90.35 173.7,90.35 174.775,91.425 177.6,91.425 v1(178.1,90.925)
  Top Layer w0.508: R58.2@144.85,110.45 144.85,108.375 C34.2@144.95,108.275 144.95,106.45 v1(144.975,106.425)
  Bottom Layer w0.229: v1(144.975,106.425) 173.775,106.425 178.1,102.1 v1@178.1,90.975
CHARGE_OP: Q9.1 U10.43 | length 53.4
  Top Layer w0.229: U10.43@169.15,87.18 169.15,78.15 174.075,73.225 174.075,67.4 176.375,65.1 183.75,65.1 196.625,52.225 Q9.1@196.625,49.5
EARTH_RET: P13.1 P13.2 | length 27.4
  Top Layer w7.62: P13.1@86.15,14.975 90.7,14.975 ; 90.7,14.925 90.7,14.975 ; v2@90.7,33.375 90.7,14.975 ; P13.2@95.15,14.975 90.7,14.975
  other v2: 90.7,33.725
FENCE_B: R36.1 U10.16 | length 18.1
  Top Layer w0.254: R36.1@154.55,105.975 154.55,103.125 156.125,101.55 161.7,101.55 165.15,98.1 U10.16@165.15,95.52
FENCE_DET: Q3.3 R19.1 U10.26 | length 49.8
  Top Layer w0.229: R19.1@129.7,87.1 138.7,87.1 142.275,90.675 142.275,96.125 143.8,97.65 146.475,97.65 147.625,96.5 147.625,93.175 150.05,90.75 U10.26@163.98,90.75
  Top Layer w0.762: Q3.3@129.7,83.275 R19.1@129.7,86.45
FENCE_FB: IC3.3 IC3.4 U10.1 | length 61.5
  Top Layer w0.229: U10.1@171.15,95.52 173.645,95.52 174.375,96.25 v1(174.375,98.25)
  Top Layer w0.635: IC3.3@133.875,94.15 IC3.4@136.775,94.15 138.35,94.15 139.1,94.9 v1(139.1,104.7)
  Bottom Layer w0.229: v1(139.1,104.7) 172.475,104.7 174.375,102.8 v1(174.375,98.25)
FENCE_G: R35.1 U10.15 | length 15.9
  Top Layer w0.229: R35.1@156.99,105.975 156.99,104.01 158.5,102.5 161.7,102.5 165.55,98.65 U10.15@165.55,95.52
FENCE_R: R34.1 U10.14 | length 14
  Top Layer w0.229: R34.1@159.431,105.975 159.431,104.544 160.675,103.3 162.106,103.3 165.95,99.456 U10.14@165.95,95.52
GND2: P11.1 P11.2 R26.1 | length 69.3
  Top Layer w7.62: R26.1@10.475,33.65 6.525,33.65 4.575,31.7 4.575,20.477 P11.1@10.055,14.997 P11.2@19.055,14.997
  Bottom Layer w7.62: R26.1@10.475,33.65 6.525,33.65 4.625,31.75 4.625,20.427 P11.1@10.055,14.997 P11.2@19.055,14.997
  other v2: 4.35,32.575
LCD_CLK: P15.5 U10.28 | length 19.5
  Top Layer w0.254: P15.5@145.025,91.275 147.075,91.275 148.4,89.95 U10.28@163.98,89.95
LCD_CS: P15.3 U10.27 | length 22.4
  Top Layer w0.254: P15.3@145.025,96.355 146.85,94.53 146.85,92.9 149.4,90.35 U10.27@163.98,90.35
LCD_MISO: P15.6 U10.29 | length 19.3
  Top Layer w0.229: P15.6@145.025,88.735 147.285,88.735 148.1,89.55 U10.29@163.98,89.55
LCD_MOSI: P15.4 U10.30 | length 28.2
  Top Layer w0.254: P15.4@145.025,93.815 143.125,91.915 143.125,88.275 143.9,87.5 147.15,87.5 148.8,89.15 U10.30@163.98,89.15
LDO_CAP: C31.2 U10.50 | length 8.9
  Top Layer w0.254: U10.50@172.32,88.75 175.6,88.75 178.3,86.05 C31.2@178.3,84.275
LOAD+: D10.1 D19.2 L1.2
LOAD-: C1.2 C2.2 C4.1 C5.2 C6.1 C32.1 C33.1 D19.1 D26.1 IC2.1 IC4.3 IC4.4 Q1.2 Q2.3 Q4.1 R1.2 R11.1 R24.2 R56.1 T1.6 T2.2 V1.1 ZD1.1 ZD7.1 | length 84.2
  Top Layer w0.508: v1(132.238,125.6) 132.238,124.513 133.2,123.55 C33.1@135.85,123.55 135.85,124.275 135.875,124.3 ; C32.1@135.875,121.375 135.875,124.3 ; R24.2@138.025,147.425 138.025,145.65 139.075,144.6 C4.1@139.075,143.675 ; IC4.3@143.14,126.425 IC4.4@141.87,126.425 140.375,126.425 139.05,125.1 136.675,125.1 135.875,124.3 ; IC2.1@149.375,137.275 149.375,134.55 v1(152.475,131.45) 152.525,131.4 R56.1@156.75,131.4
  Top Layer w0.762: Q1.2@194.675,135.75 195.475,134.95 v1(196.325,134.95)
  Top Layer w1.016: R24.2@138.025,147.425 138.025,150.75 140.1,152.825 V1.1@140.1,153.175
  Top Layer w1.27: R1.2@202.3,135.15 202.3,132.975 200.225,130.9 200.225,119.275 202.25,117.25 C1.2@206.425,117.25 ; C6.1@208.395,163.825 206.75,162.18 R11.1@206.75,159.225 206.75,158.225 208.59,156.385 208.59,152.85
  Top Layer w2.54: 209.625,114.575 216.285,114.575 D19.1@216.425,114.715
  other v1: 206,107.025 214,107.025 206,109.525 214,109.525 206,112.025 214,112.025 130.85,125.6 218.325,145.6 220.225,145.6 218.325,147.3 220.225,147.3 120.625,148.425 118.55,148.45 138.7,150.4 140.312,150.4 141.925,150.4 207.5,152.975 209.4,152.975 207.5,154.675 209.4,154.675
LOAD_LED: P3.14 R57.1 | length 15.4
  Top Layer w0.229: P3.14@175,114.315 175,112.025 176.075,110.95 182.275,110.95 182.875,110.35 R57.1@182.875,109.175
  Top Layer w0.508: P3.14@175,114.315 P3.14@175,117.675
LOAD_OP: Q10.1 U10.42 | length 59.2
  Top Layer w0.229: v1(167.9,82.625) 168.75,83.475 U10.42@168.75,87.18 ; v1(200.025,96.5) 202.275,96.5 Q10.1@203.325,97.55
  Bottom Layer w0.229: v1(167.9,82.625) 167.9,81.525 170.1,79.325 172.4,79.325 188.125,95.05 188.125,99.85 190.15,101.875 198.1,101.875 199.75,100.225 199.75,96.775 v1(200.025,96.5)
MOSFET_FIRE: U5.2 U10.18 | length 75.1
  Top Layer w0.229: v1(152.4,111.45) 152.4,98.8 154.55,96.65 155.975,96.65 158.675,93.95 U10.18@163.98,93.95
  Top Layer w0.762: U5.2@196.27,119.625 196.27,116.98 v1(196.275,116.975)
  Bottom Layer w0.762: v1(152.4,111.45) 155.875,111.45 161.4,116.975 v1(196.275,116.975)
NetBR1_1: BR1.1 C11.2 U1.1 | length 31.7
  Top Layer w1.27: BR1.1@71.467,75.632 72.674,74.425 87.925,74.425 89.2,75.7 89.2,78.5 87.563,80.137 U1.1@84.567,80.137 ; C11.2@76.8,69.355 76.8,74.125 76.875,74.2
NetBR1_2: BR1.2 C11.1 U1.2 | length 21.3
  Top Layer w1.27: C11.1@76.8,84.595 77.025,84.37 77.025,79.475 78.903,77.597 U1.2@84.567,77.597
  Top Layer w3.302: BR1.2@71.467,80.832 71.467,82.267 73.795,84.595 C11.1@76.8,84.595
NetBR1_3: BR1.3 R5.2 R23.1 R26.2 | length 65.7
  Top Layer w3.81: R23.1@52.725,83.85 59.069,83.85 BR1.3@62.087,80.832
  Top Layer w5.08: R5.2@18.25,68.375 18.25,79.85 22.225,83.825 52.7,83.825 R23.1@52.725,83.85
  Top Layer w7.62: R26.2@10.475,68.65 R5.2@17.975,68.65
NetBR1_4: BR1.4 R5.1 R15.2 R23.2 | length 23.7
  Top Layer w2.54: R23.2@52.725,75.85 53.25,75.325 R5.1@53.25,68.375 61.875,68.375 R15.2@62.025,68.525 62.087,68.587 BR1.4@62.087,75.632
NetC3_1: C3.1 D27.2 R9.2 R12.2 | length 9.2
  Top Layer w1.27: D27.2@124.05,87.885 124.05,94.5 124.05,96.95 R9.2@124.15,97.05
NetC5_1: C5.1 D7.2 D8.2 R21.1 TX.2 V1.2 | length 36.5
  Top Layer w0.762: V1.2@140.1,161.175 140.95,161.175 141.675,161.175 145.5,157.35 R21.1@145.5,151.05
  Top Layer w2.54: C5.1@119.761,163.347 126.18,163.347 TX.2@126.257,163.424 127.508,164.675 D8.2@132.5,164.675 137.45,164.675 V1.2@140.95,161.175
NetC6_2: C6.2 D5.2 R11.2 | length 14.1
  Top Layer w1.524: D5.2@199.185,158.425 D5.2@199.485,158.725
  Top Layer w2.032: D5.2@199.185,158.925 199.485,159.225 R11.2@203.15,159.225
  Top Layer w2.54: C6.2@193.155,164.575 195.6,164.575 199.185,160.99 D5.2@199.185,158.925
NetC27_1: C27.1 Q1.3 R2.1 | length 8.8
  Top Layer w0.762: C27.1@190.45,139.8 192.225,139.8 193.525,138.5 Q1.3@193.725,138.5 193.85,138.375 R2.1@198.7,138.375
NetC27_2: C27.2 Q2.1 | length 4.1
  Top Layer w0.762: C27.2@190.45,142.2 191.753,142.2 Q2.1@193.728,144.175
NetD5_1: D5.1 Q2.2 T1.3 ZD7.2
  other v1: 189.85,148.825 189.85,150.883 201.85,152.875 204.325,152.875 189.85,152.942 189.85,155 201.85,155.15 204.325,155.15
NetD6_1: D6.1 T1.4 | length 27.6
  Top Layer w2.54: D6.1@149.275,159.55 151.725,157.1 151.725,141.325 T1.4@157.65,135.4
NetD6_2: D6.2 D7.1 | length 5.8
  Top Layer w2.54: D7.1@143.66,165.75 148.825,165.75 D6.2@149.275,165.3
NetD8_1: D8.1 D9.2 | length 6.1
  Top Layer w2.54: D8.1@132.5,156.975 132.5,150.95 D9.2@132.55,150.9
NetD9_1: D9.1 D26.2 Q4.2 TX.1 | length 69
  Top Layer w2.54: Q4.2@121.6,130.775 121.6,136.625 ; 123.319,138.344 126.2,141.225 D26.2@126.2,145.35 ; TX.1@126.257,151.424 126.257,145.407 D26.2@126.2,145.35 ; D9.1@132.55,143.2 128.35,143.2 D26.2@126.2,145.35
  Bottom Layer w2.54: v1(118.45,137.812) v1(118.45,123.738) v1(121.15,123.738) v1(123.85,123.738) v1(126.55,123.738) v1(126.55,137.812) v1(123.85,137.812) v1(121.15,137.812)
NetD11_1: D11.1 U7.3 | length 20.5
  Top Layer w0.508: D11.1@137.1,128.64 v1(139.81,128.64) ; v1(148.625,126.725) 148.675,126.675 148.675,125.65 149.375,124.95 153.075,124.95 153.545,125.42 U7.3@153.545,127.125
  Bottom Layer w0.508: v1(139.81,128.64) 146.685,128.64 v1@148.625,126.7
NetD11_2: D11.2 Q4.3 | length 4.2
  Top Layer w2.032: Q4.3@132.2,133.315 D11.2@136.395,133.315
NetD12_1: D12.1 U2.1 | length 4.8
  Top Layer w0.762: D12.1@171.25,62.39 171.465,62.175 U2.1@175.93,62.175
NetD12_2: D12.2 R10.1 | length 3.9
  Top Layer w0.762: R10.1@167.775,65.95 170.19,65.95 D12.2@171.25,67.01
NetD15_2: D15.2 L2.1 U3.2 | length 17.1
  Top Layer w1.016: U3.2@133.699,46.825 137.25,46.825 138.4,45.675 L2.1@143.6,45.675 144.975,44.3 D15.2@144.975,39.55
NetD27_1: D27.1 R18.2 U1.3 | length 11.6
  Top Layer w1.27: U1.3@117.567,77.597 122.928,77.597 R18.2@122.95,77.575 122.95,81.2 124.2,82.45 D27.1@124.2,83.24
NetF1_2: F1.2 L1.1
NetF3_1: F3.1 P9.2 | length 19.4
  Top Layer w2.54: F3.1@163.05,32.075 162.8,31.825 162.8,27.375 166.215,23.96 P9.2@166.215,14.172
NetIC3_1: IC3.1 R9.1 R28.2 | length 7.7
  Top Layer w0.635: R9.1@126.55,97.05 R28.2@129.825,97.05 ; R28.2@129.825,97.025 132.9,97.025 IC3.1@133.875,96.05